# Altium PCB PCB2.PcbDoc
Units mm, origin at the board's own origin, x right, y up, seen from the top; angles counter-clockwise.
Board outline 60 x 40 mm, 4 copper layers (Top Layer, Internal Plane 1, Internal Plane 2, Bottom Layer), stack 0.462 mm thick; 19 components, 9 nets, 59 pads, 2 vias.
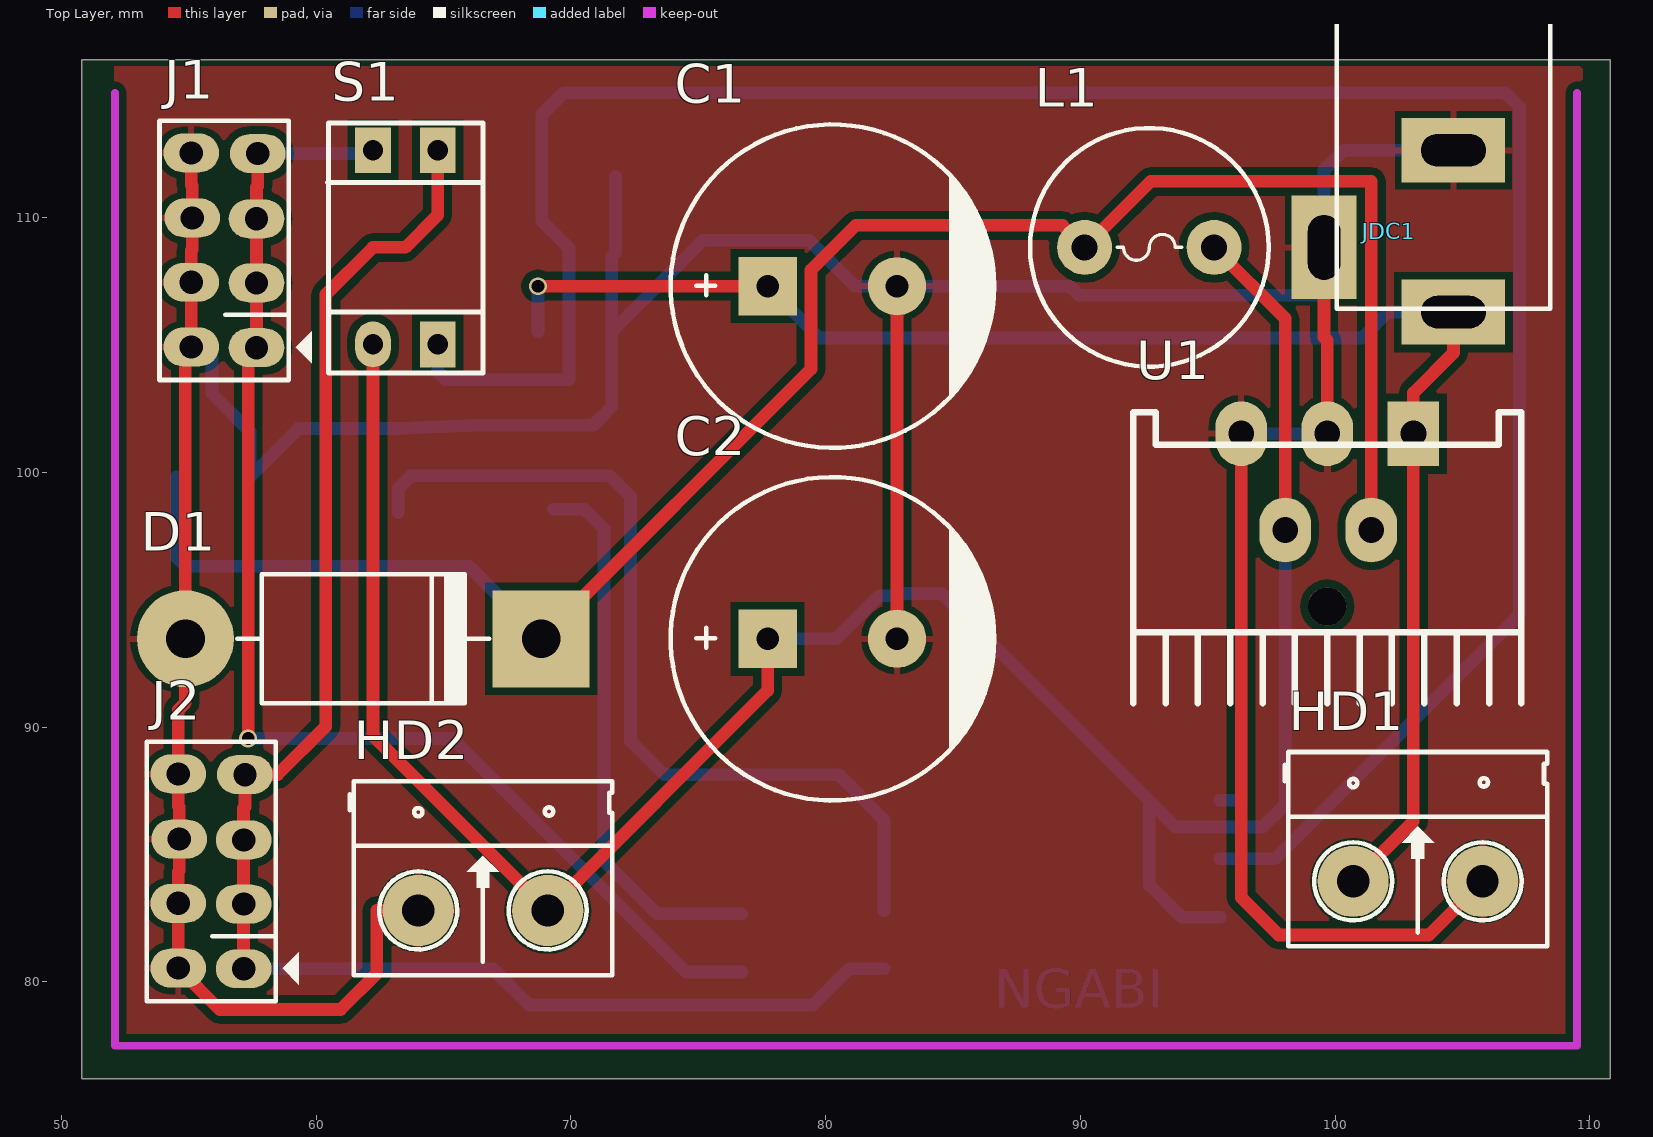
[diagram p0: Top Layer view]
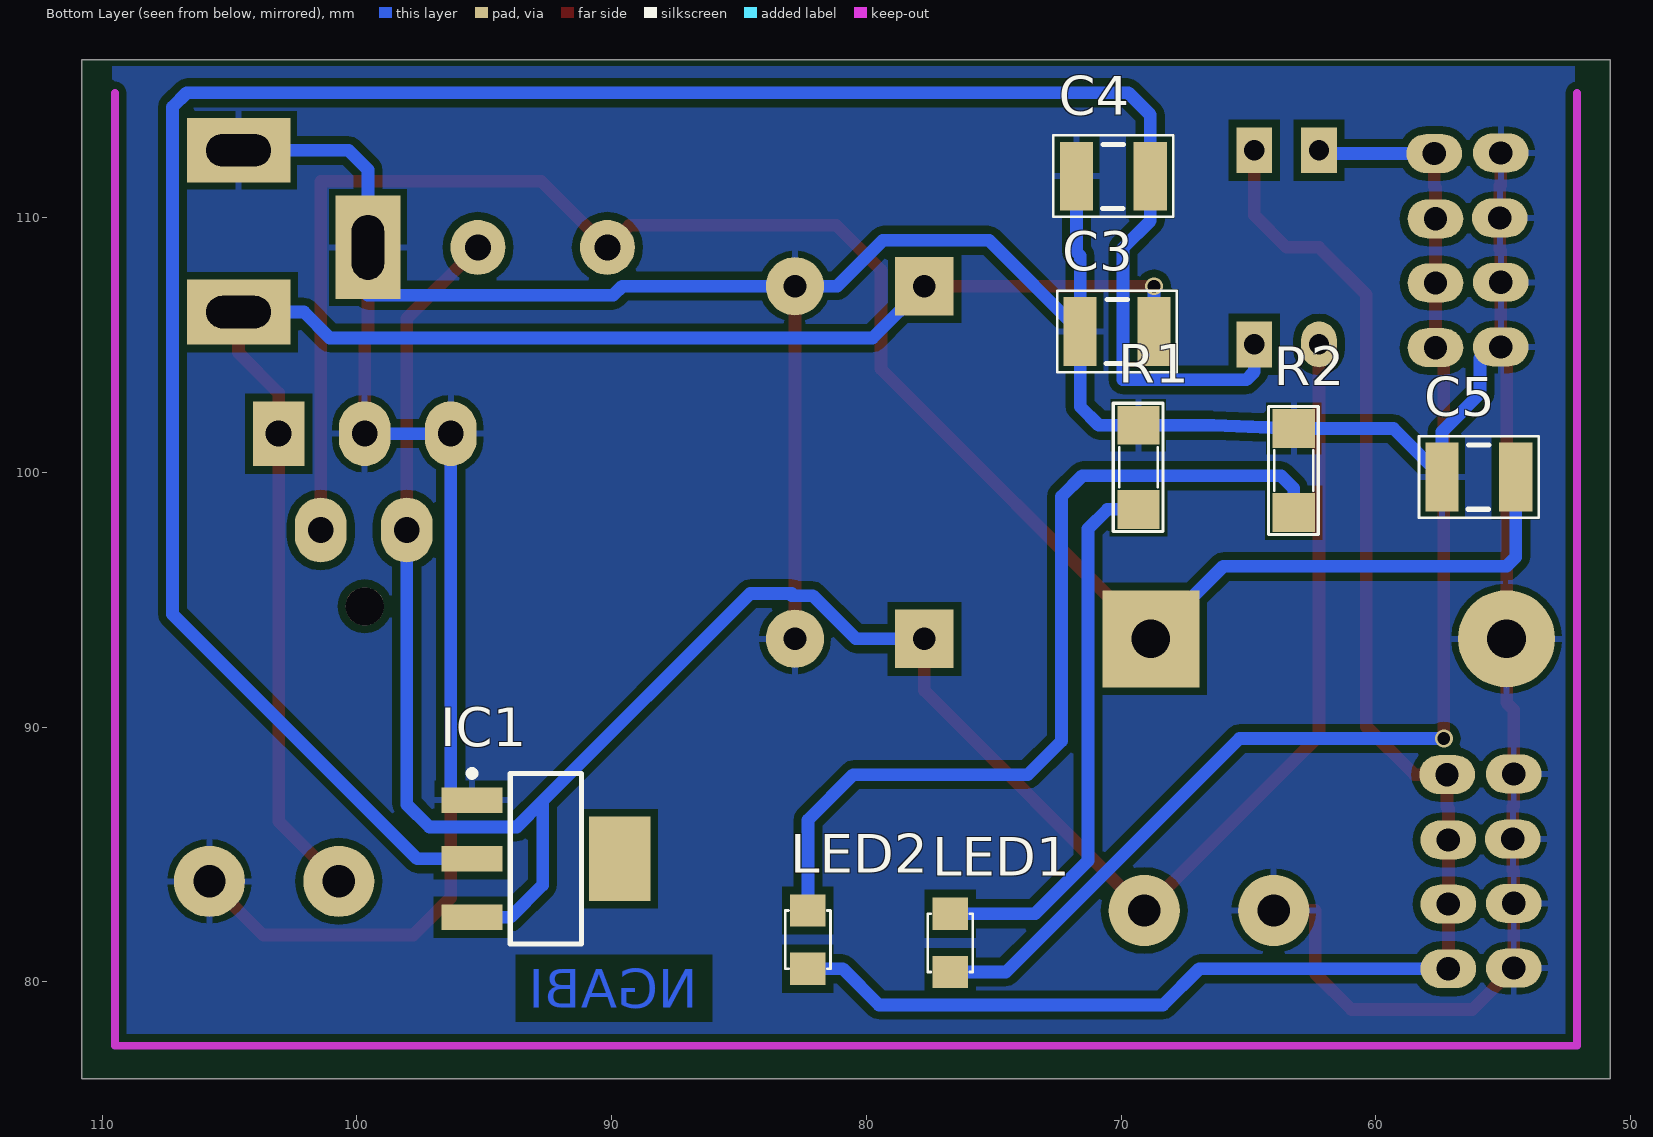
[diagram p1: Bottom Layer view, seen from below]
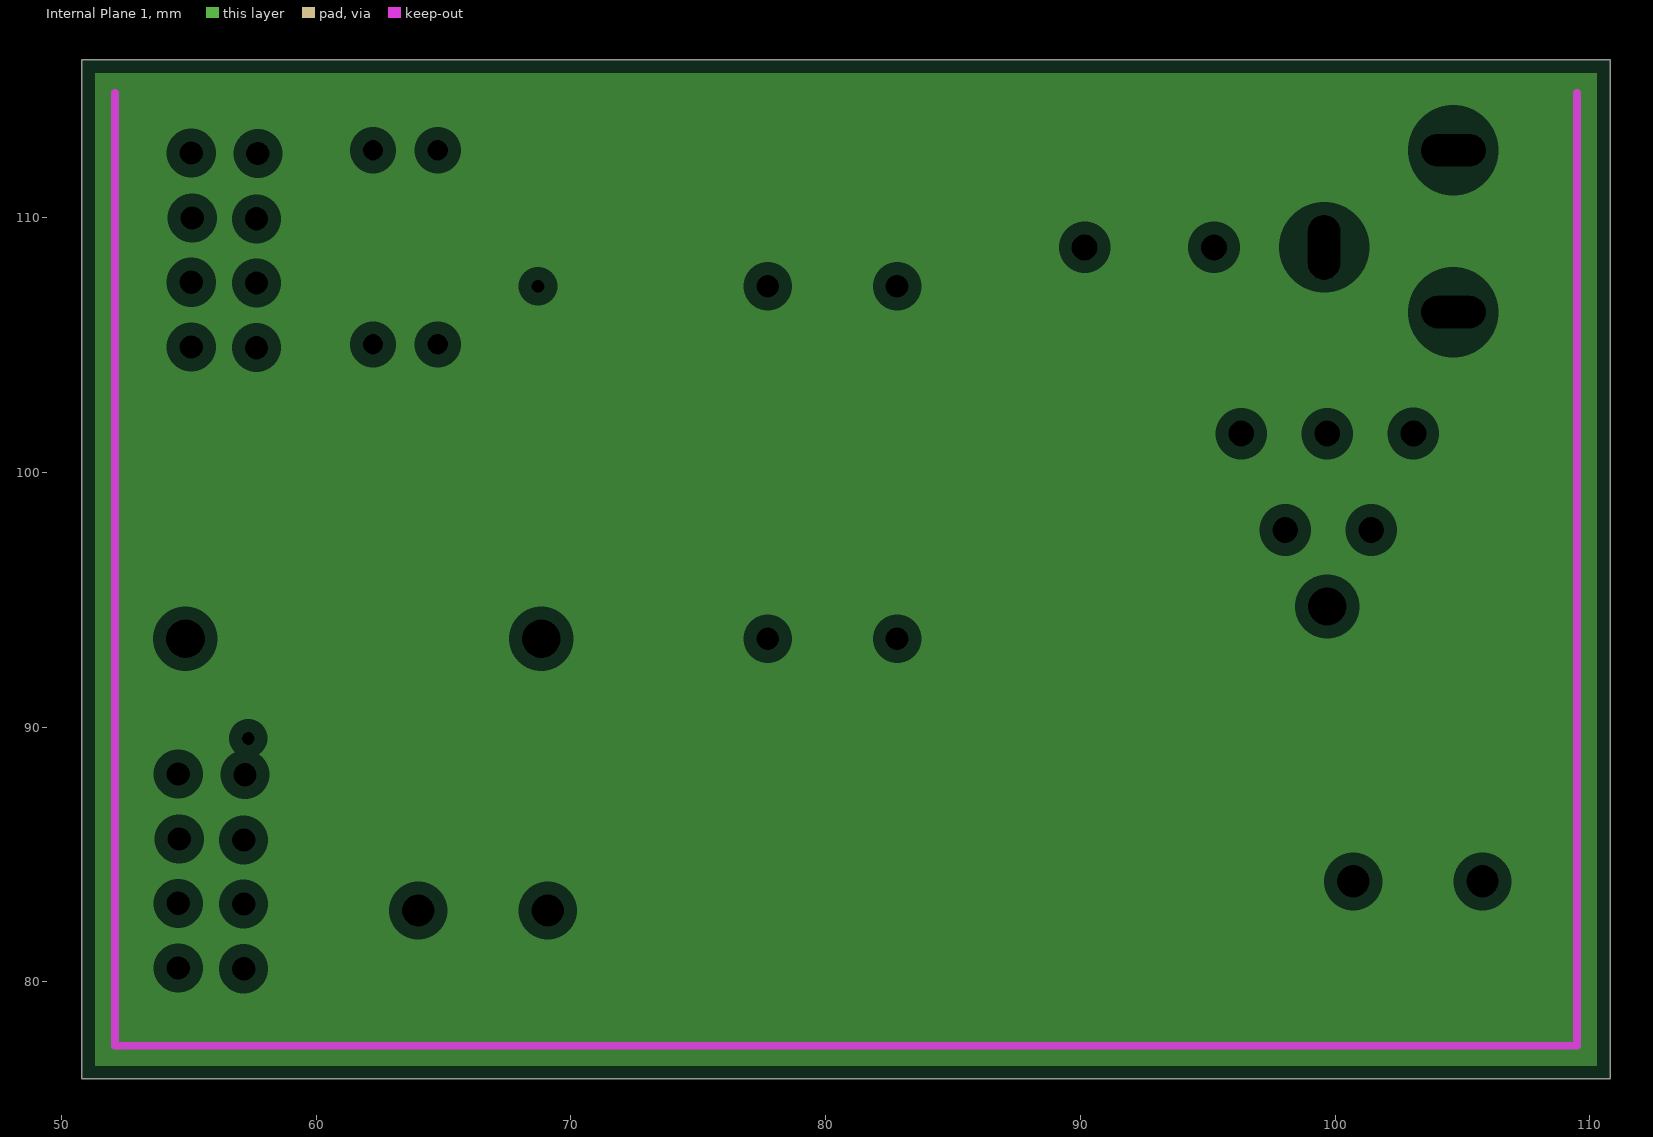
[diagram p2: Internal Plane 1, clearances drawn from the general rule]
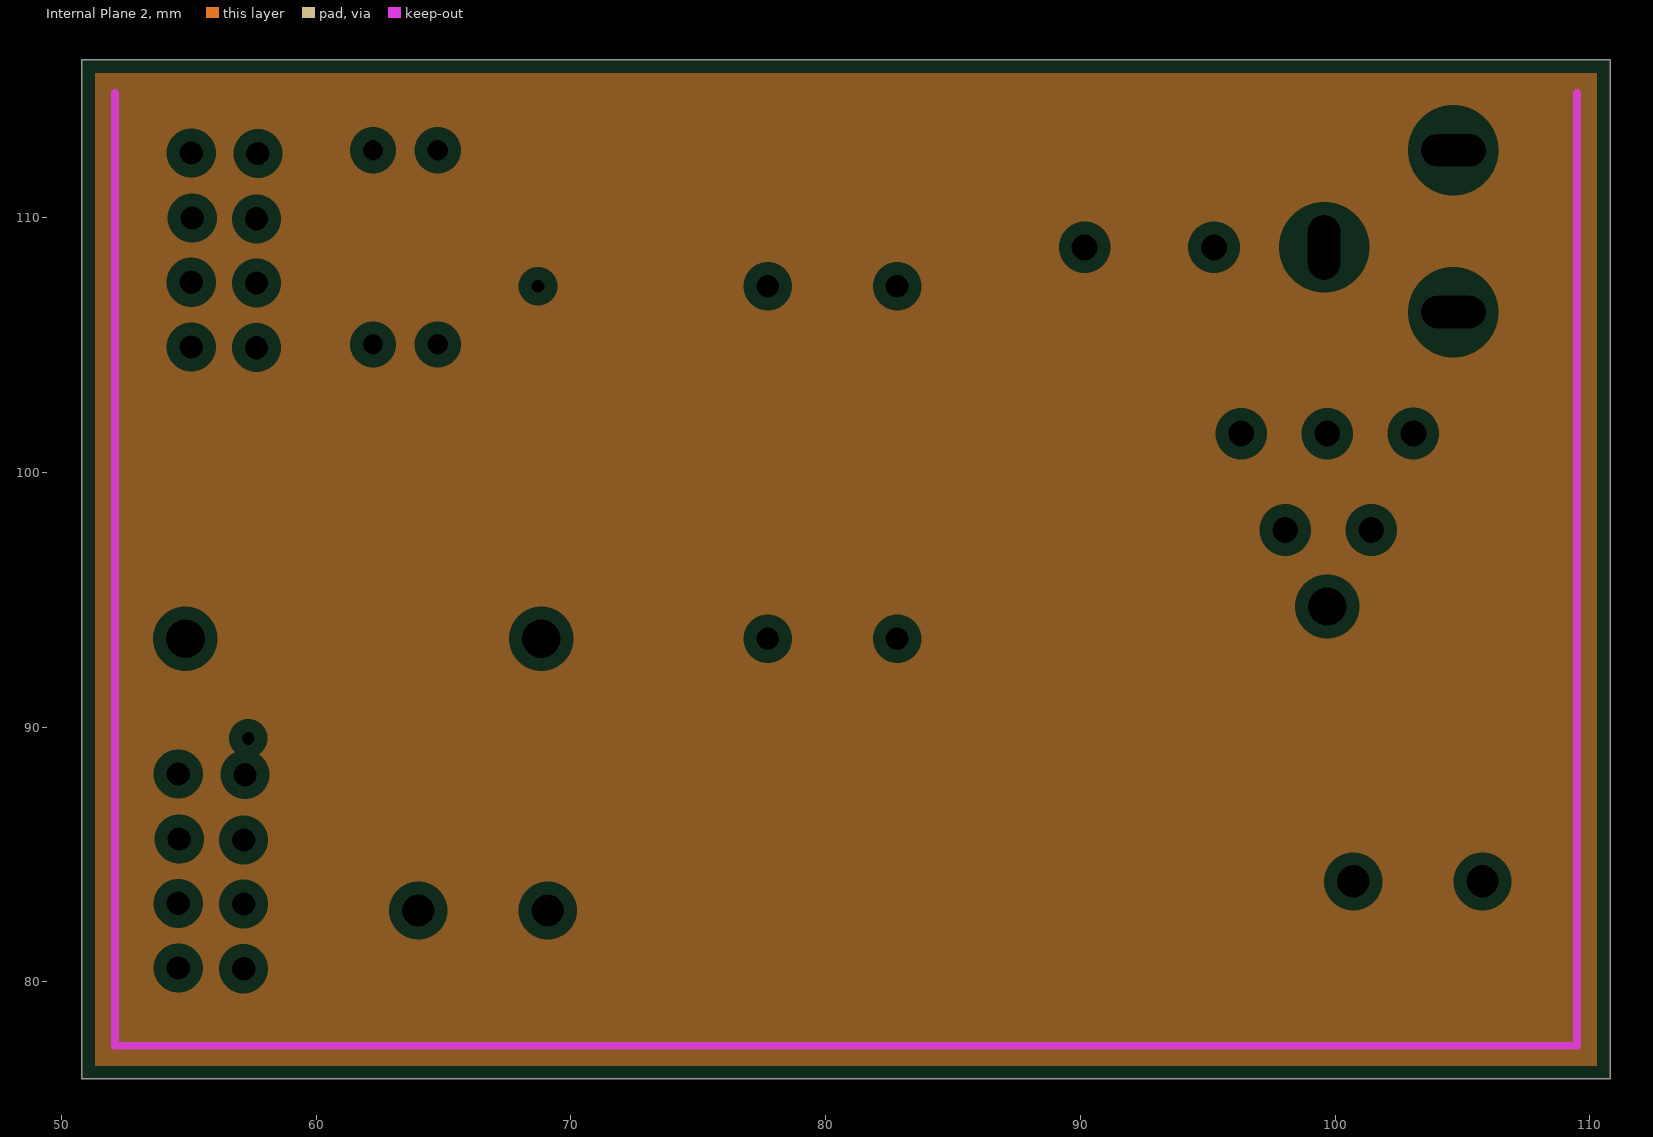
[diagram p3: Internal Plane 2, clearances drawn from the general rule]
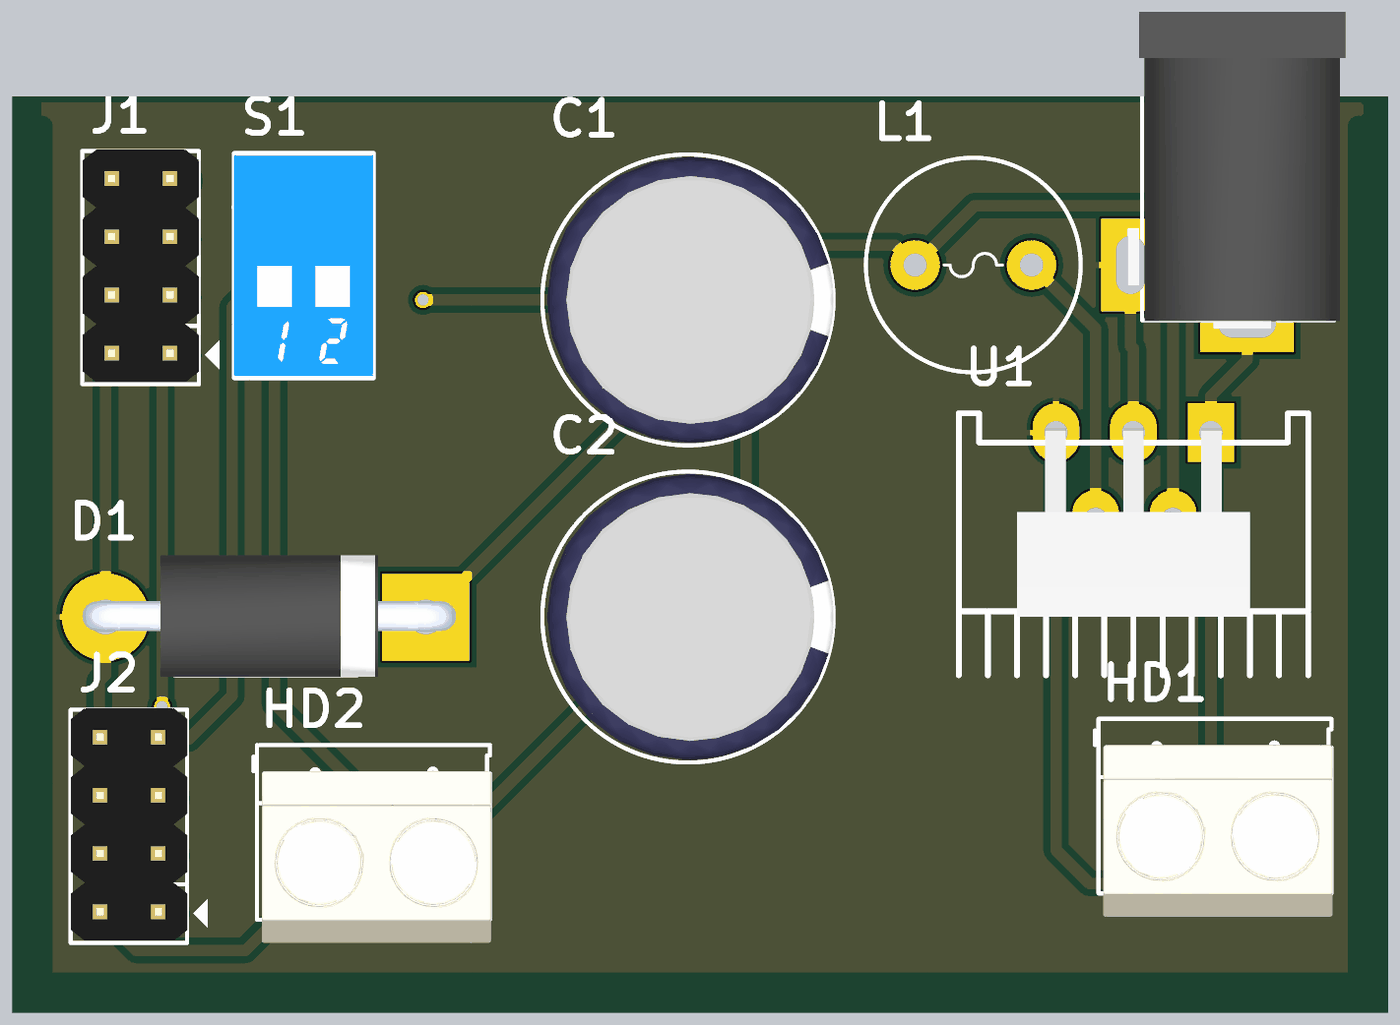
[diagram p4: 3D render of the assembled board from above, using the file's embedded part models]
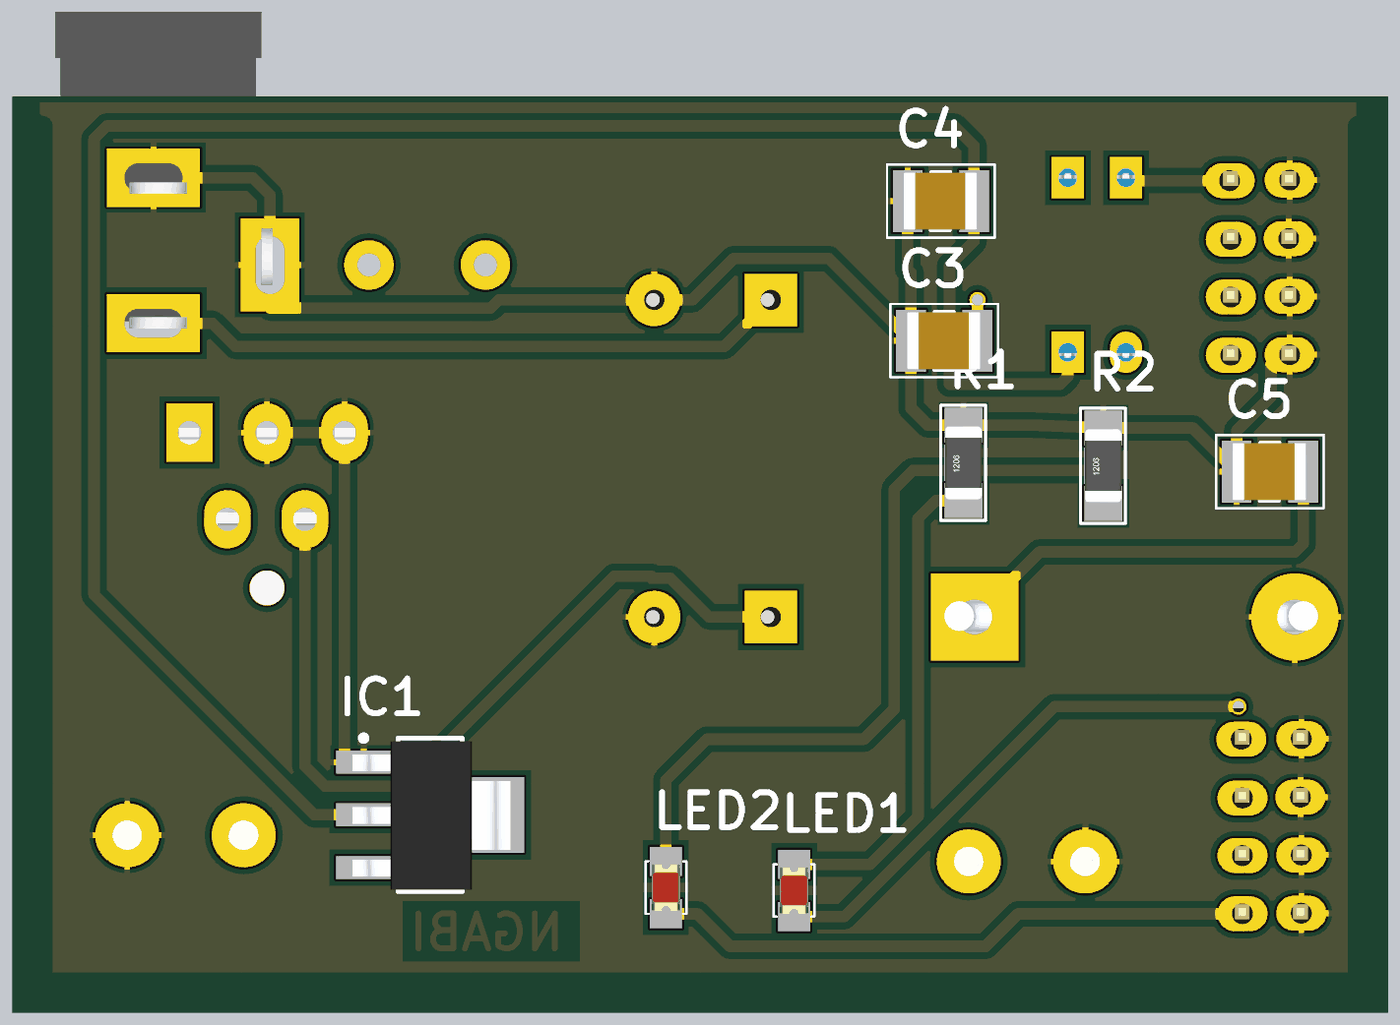
[diagram p5: 3D render of the assembled board from below, using the file's embedded part models]

## Layer stack, top to bottom
Top Solder: solder mask 0.0102, Solder Resist, Dk 3.5
Top Layer: signal copper 0.0356
Internal Plane 1: plane copper 0.0356
Internal Plane 2: plane copper 0.0356
Dielectric 1: dielectric 0.32, FR-4, Dk 4.8
Bottom Layer: signal copper 0.0356
Bottom Solder: solder mask 0.0102, Solder Resist, Dk 3.5

## Board outline
50.8,76.2 110.8,76.2 110.8,116.2 50.8,116.2

## Design rules (kind name [scope] priority, off if disabled: settings)
Clearance [All] p1: gap=0.3
PlaneClearance [All] p1: clearance=0.508
PlaneConnect [All] p1: planeconnectstyle=Relief reliefexpansion=0.508 reliefentries=4 reliefconductorwidth=0.254 reliefairgap=0.254
PolygonConnect [All] p1: connectstyle=Relief reliefconductorwidth=0.254 reliefentries=4 polygonreliefangle="90 Angle" airgapwidth=0.254
RoutingVias [All] p1: holewidth=0.5 width=0.7 viastyle="Through Hole" minholewidth=0.711 minwidth=1.27 maxholewidth=0.711 maxwidth=1.27
SMDNeckDown [All] p1: percent=50.000
SolderMaskExpansion [All] p1: expansion=0.102
Width [All] p1: maxlimit=0.7 minlimit=0.3 preferedwidth=0.5 minimp=50.000000 maximp=50.000000 favimp=50.000000
28 further rules are at their usual default settings.

## Components (designator, comment, footprint, x,y, rotation, side; value= is the part's Value field where it differs from the comment)
C1 "Cap Pol3" CP2/5 77.724,107.315 r0 top
C2 "Cap Pol3" CP2/5 77.724,93.472 r0 top
C3 "100pF" SM-CAP-3225 71.607,105.537 r180 bottom
C4 "100pF" SM-CAP-3225 71.755,111.633 r180 bottom
C5 "100pF" SM-CAP-3225 57.404,99.822 r180 bottom
D1 "1N5408" D5A 68.834,93.472 r180 top
HD1 "Header 2" HED2 100.711,83.947 r0 top
HD2 "Header 2" HED2 64.008,82.804 r0 top
IC1 "LM1117" SOT223-4N 92.583,84.836 r180 bottom
J1 "Connector 4x2" JP4x2 56.401,108.725 r90 top
J2 "Connector 4x2" JP4x2 55.893,84.341 r90 top
JDC1 "Jac DC" DC-IN 102.108,109.474 r270 top
L1 "220mH" L01 92.71,108.839 r0 top
LED1 "LED" SM-LED-0805-Red 76.708,80.391 r90 bottom
LED2 "LED" SM-LED-0805-Red 82.296,80.518 r90 bottom
R1 "330R" SM-RES-1206 69.317,98.552 r90 bottom
R2 "330R" SM-RES-1206 63.221,98.425 r90 bottom
S1 "SW DIP-2" DIPSWITCH2 62.23,105.029 r0 top
U1 "LM2576T-5.0" LM2576t 99.72,97.282 r180 top

## Footprints (in the part's own frame and the unit in brackets; to place one, negate y for a bottom-side part, rotate by r counter-clockwise, add the part's x,y. Pads: shape width x height; smd on the part's side, far side on the other; paste and mask are expansions set on the pad)
CP2/5 [mil] "Tu hoa 1000uF/25V,50V"
  rect 90x90 hole 35: 1(0,0)
  round 90 hole 35: 2(200,0)
  silkscreen extent -150,-250 350,250, body extent -142,-246 350,246, height 984
D5A [mil] "Diode 5A, W 200mil, L 550mil"
  round 150 hole 60: 1(550,0)
  rect 150x150 hole 60: 2(0,0)
  silkscreen extent 80,-100 470,100, body extent -52,-106 590,103, height 254
DC-IN [mil] "Jac DC input"
  rect 100x160 hole 50 slot 100 at 90 deg: 1(125,100) 2(-125,100)
  rect 160x100 hole 50 slot 100 at 0 deg: 3(25,-100)
  silkscreen extent -425,-80 120,250, body extent -410,-105 134,269, height 434
DIPSWITCH2 [mm]
  oval 1.4x1.8 hole 0.8: 1(0,0)
  rect 1.4x1.8 hole 0.8: 2(2.54,0) 3(2.54,7.62) 4(0,7.62)
  silkscreen extent -1.78,-1.12 4.32,8.69, body extent -1.77,-1.02 4.31,8.58, height 6.3
HED2 [mil] "Header 2, 2 pin, hight 300mil, Pin to Pin 200, Colour Green"
  round 110 hole 50: 1(0,0) 2(200,0)
  silkscreen extent -106,-100 300,200, body extent -92,-140 302,155, height 394
JP4x2 [mil] "Connector 4x2"
  oval 60x86 hole 36: 1(-150.5,-49.5) 2(-50.5,-49.5) 3(48.5,-49.5) 4(149.5,-51.5) 5(-149.5,51.5) 6(-49.5,51.5) 7(50,50) 8(150.5,51.5)
  silkscreen extent -200,-135 200,101, body extent -197,-100 203,100, height 335
L01 [mil] "Inductor"
  round 85 hole 40: 1(-100,0) 2(100,0)
  silkscreen extent -184,-184 184,184
LM2576t [mil]
  rect 80x100 hole 40: 1(-132,-167.09)
  oval 80x100 hole 40: 2(-67,-18) 3(1,-167) 4(66,-18) 5(134,-167)
  round 59.06 hole 59.06: ""(1,100)
  silkscreen extent -299,-200 301,250, body extent -199,-175 201,150, height 859
SM-CAP-3225 [mm] "Chip Capacitor, Body 3.2x2.5mm, IPC Medium Density"
  rect 1.3x2.7 smd: 1(0,0) 2(2.9,0)
  silkscreen extent -0.9,-1.6 3.8,1.6, body extent -0.18,-1.25 3.02,1.25, height 1
SM-LED-0805-Red [mil]
  rect 50x55 smd: 1(0,0) 2(90,0)
  silkscreen extent 0,-35 90,35, body extent 5,-25 85,25, height 43
SM-RES-1206 [mil]
  rect 60x65 smd: 1(0,0) 2(130,0)
  silkscreen extent -34,-38 164,39, body extent 2,-31 128,31, height 40
SOT223-4N [mm] "SOT223, 4-Leads, Body 6.5x3.5mm, Pitch 2.3mm, Lead Span 7mm, IPC Medium Density"
  rect 2.4x1 smd: 1(-2.9,2.3) 2(-2.9,0) 3(-2.9,-2.3)
  rect 2.4x3.3 smd: 4(2.9,0)
  silkscreen extent -3.03,-3.35 1.4,3.47, body extent -3.39,-3.27 3.5,3.23, height 1.72

## Part data
C1 C2: "Polarized Capacitor (Surface Mount)"
C3 C4 C5: library part CN1, "Cap np  1pF - 472pF"
D1: library part D5A, "Diode 5A"
HD1 HD2: library part Hed2, "Header 2 (Green)"
IC1: "Available in 1.8V, 2.5V, 2.85V, 3.3V, 5V, and  Adjustable Versions"
J1 J2: library part JP4x2
JDC1: library part DCIN, "Jac DC input"
L1: library part L1, "Inductor"
LED1 LED2: "LED Single colour Green and Red"
R1 R2: library part R1/4W, "Resistor 1/4W"
S1: "DIP Switch, 2 Position, SPST"
U1: "SIMPLE SWITCHER; 3A Step-Down Voltage Regulator"

## Via types
v1: diameter 0.7, hole 0.5, Top Layer to Bottom Layer, 2 vias

## Nets (pads, with @x,y where several pads share a name; then routed paths per layer and width w, separated by ;. In a path a pad name is that pad's centre, name@x,y a point inside that pad or via, vN(x,y) a via of type N, cw(c..) or ccw(c..) an arc to the next point about the centre after c; other vN are vias at no path point)
3V3: J2.1 J2.2 J2.3 J2.4 LED2.1 S1.3 | length 63.1
  Top Layer w0.5: J2.1 J2.2 J2.3 57.15,86.817 57.201,86.868 J2.4 58.483,88.138 60.376,90.03 60.376,106.985 62.23,108.839 63.5,108.839 64.77,110.109 S1.3
  Bottom Layer w0.5: J2.1 66.929,80.518 68.351,79.096 79.502,79.096 80.924,80.518 LED2.1
3V3_IN: C4.2 IC1.2 S1.2 | length 91.8
  Bottom Layer w0.5: S1.2 64.77,103.954 65.087,103.637 69.926,103.637 69.926,108.809 68.855,109.88 C4.2 68.855,114.046 69.719,114.91 106.68,114.91 107.239,114.351 107.239,94.437 97.638,84.836 IC1.2
5V: J1.1 J1.2 J1.3 J1.4 LED1.1 S1.4 | length 51.1
  Top Layer w0.5: v1(57.328,89.56) 57.328,104.902 J1.1 J1.2 J1.3 57.658,111.201 57.709,111.252 J1.4
  Bottom Layer w0.5: v1(57.328,89.56) 65.354,89.56 74.524,80.391 LED1.1 ; J1.4 62.23,112.522 S1.4
5V_IN: C2.1 HD2.2 IC1.3 L1.2 S1.1 U1.4 | length 94.1
  Top Layer w0.5: S1.1 62.23,89.662 HD2.2 77.724,91.44 C2.1 ; L1.2 98.044,106.045 U1.4
  Bottom Layer w0.5: C2.1 80.41,93.472 82.103,95.165 82.931,95.165 ; 82.931,95.25 84.557,95.25 92.71,87.097 ; IC1.3 93.98,82.536 92.71,83.806 92.71,87.097 ; U1.4 98.044,86.97 97.155,86.081 93.726,86.081 92.71,87.097
GND: C1.2 C2.2 C3.1 C4.1 C5.1 D1.1 HD1.2 HD2.1 IC1.1 J1.5 J1.6 J1.7 J1.8 J2.5 J2.6 J2.7 J2.8 JDC1.2 JDC1.3 R1.2 R2.2 U1.3 U1.5 | length 185.8
  Top Layer w0.5: J1.8 55.093,111.29 55.131,111.252 J1.7 55.131,108.75 55.093,108.712 J1.6 J1.5 54.864,104.927 D1.1 54.864,90.957 54.585,90.678 J2.8 54.585,86.906 54.623,86.868 J2.7 54.623,84.366 54.585,84.328 J2.6 J2.5 56.21,78.918 60.96,78.918 62.382,80.34 62.382,82.804 HD2.1 ; C2.2 C1.2 ; U1.5 96.317,83.312 97.79,81.839 103.683,81.839 HD1.2 ; JDC1.3 99.568,105.308 99.695,105.181 U1.3
  Bottom Layer w0.5: J1.5 55.905,104.496 55.905,103.099 57.404,101.6 C5.1 59.309,101.727 R2.2 66.396,101.854 R1.2 70.876,101.854 71.607,102.585 C3.1 ; C4.1 71.755,108.657 71.607,108.509 C3.1 ; IC1.1 96.317,87.136 U1.5 U1.3 ; JDC1.2 100.33,112.649 99.568,111.887 JDC1.3 99.568,106.959 89.941,106.959 89.586,107.315 C1.2 81.153,107.315 79.35,109.118 75.188,109.118 C3.1
NetC1_1: C1.1 C3.2 HD1.1 JDC1.1 U1.1 | length 63
  Top Layer w0.5: v1(68.707,107.315) C1.1 ; HD1.1 103.073,86.309 U1.1 103.073,103.124 104.648,104.699 JDC1.1
  Bottom Layer w0.5: C3.2 v1(68.707,107.315) ; C1.1 79.756,105.283 101.067,105.283 102.083,106.299 JDC1.1
NetC5_2: C5.2 D1.2 L1.1 U1.2 | length 75.5
  Top Layer w0.5: D1.2 79.426,104.064 79.426,107.95 81.178,109.703 89.306,109.703 L1.1 92.761,111.43 101.422,111.43 U1.2
  Bottom Layer w0.5: C5.2 54.504,96.677 54.864,96.317 65.989,96.317 D1.2
NetLED1_2: LED1.2 R1.1 | length 21.6
  Bottom Layer w0.5: R1.1 70.536,98.552 71.298,97.79 71.298,84.76 73.381,82.677 LED1.2
NetLED2_2: LED2.2 R2.1 | length 35
  Bottom Layer w0.5: R2.1 63.221,99.377 63.716,99.873 71.526,99.873 72.339,99.06 72.339,89.459 73.66,88.138 80.518,88.138 82.296,86.36 LED2.2
pads on no net: IC1.4 U1.

## Polygon pours and split planes (outlines as drawn)
GND on Bottom Layer "GND_L04_P008" (solid, pour order 8): 52.197,115.951 109.601,115.951 109.601,77.601 109.5,77.5 109.403,77.597 51.943,77.597
GND on Top Layer "hh" (solid, pour order 6): 52.07,115.951 109.601,115.951 109.728,115.824 109.728,77.597 52.227,77.597 52.1,77.724 52.07,77.724

## Keep-outs
Keep-Out Layer:
  lines w0.3: 18.826,29.81 76.226,29.81 ; 52.1,114.9 52.1,77.5 109.5,77.5 109.5,114.9

## Other copper
Bottom Layer:
  text "NGABI" at 86.614,78.994 h1.52

## Silkscreen, mask and mechanical layers (free items; w line width, h text height)
Drill Drawing:
  text ".LEGEND" at -16.073,35.179 h1.52

## Dimensions
52.1,77.5 to 52.1,114.9 on Mechanical 1
52.1,77.5 to 109.5,77.5 on Mechanical 1